# Allegro board AVRUSB5.brd
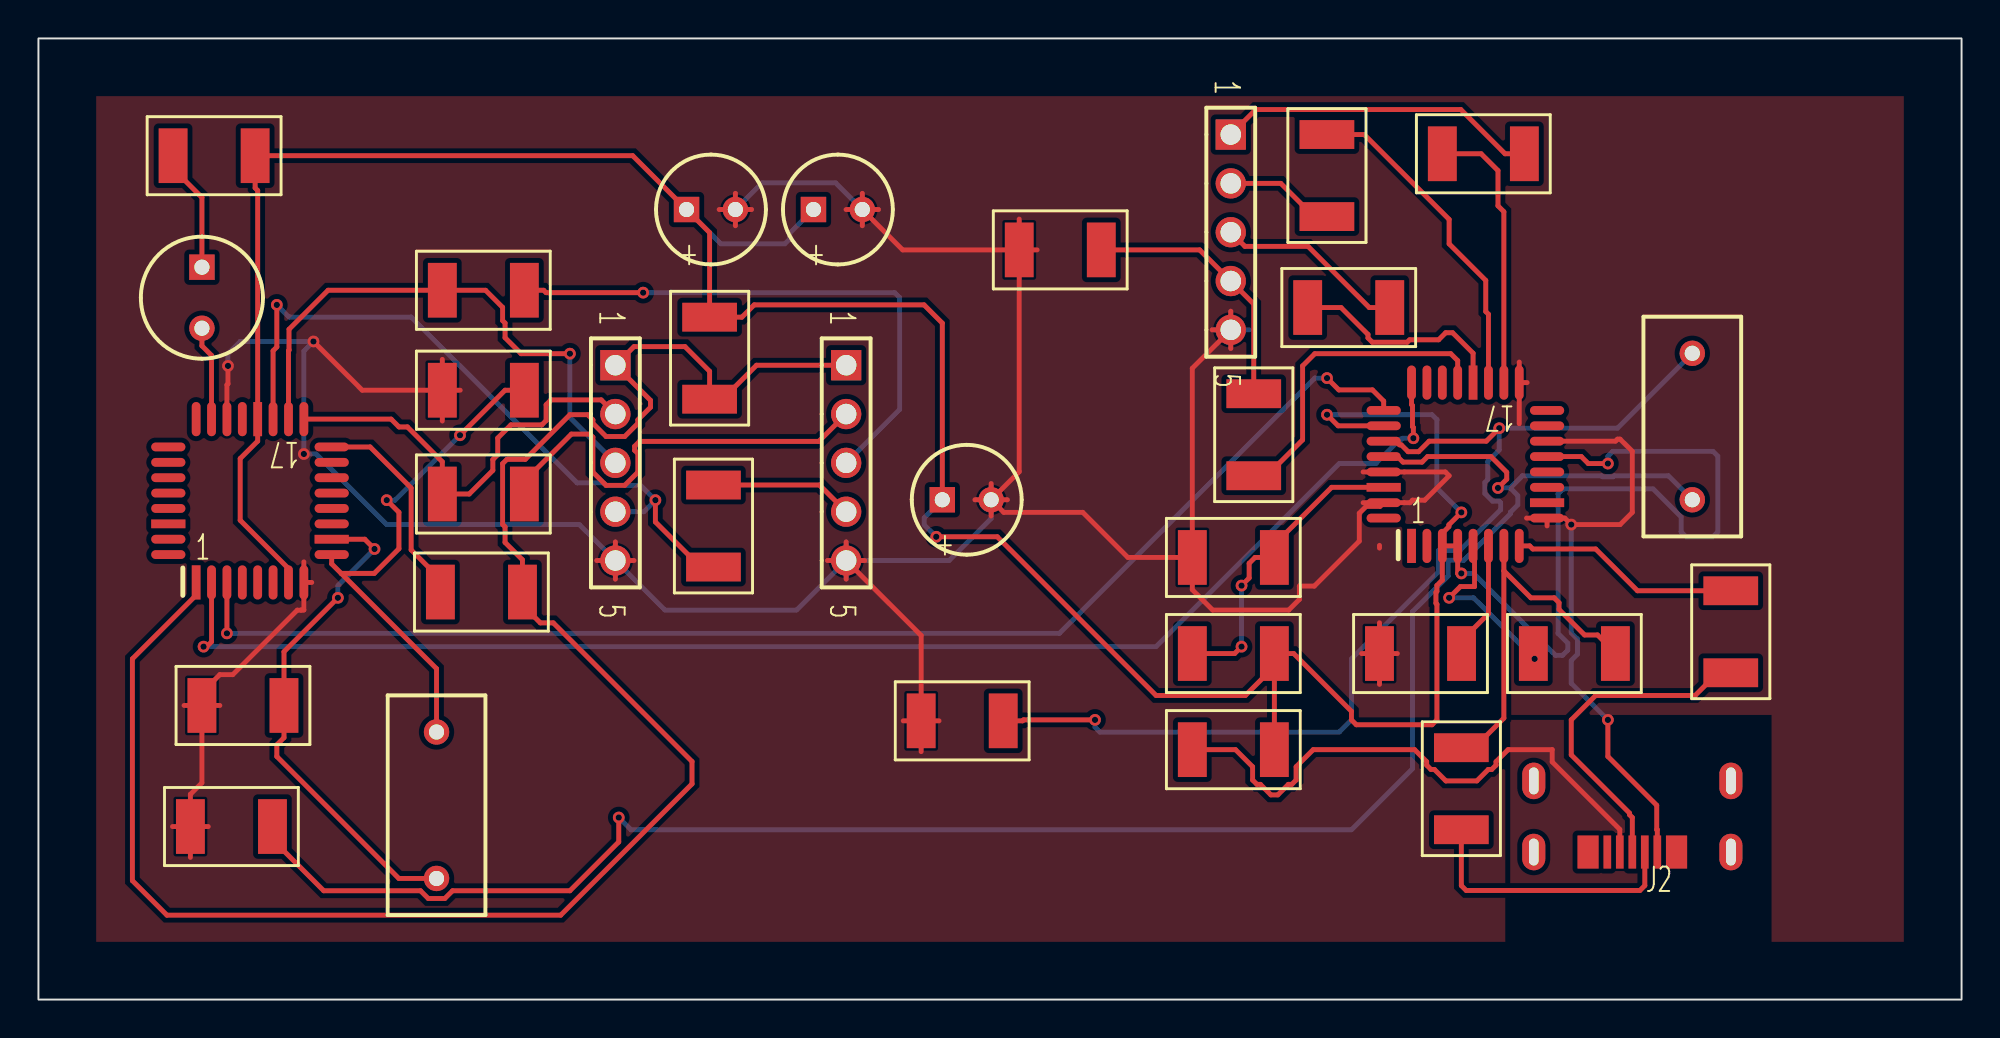
[diagram p0: board, top side]
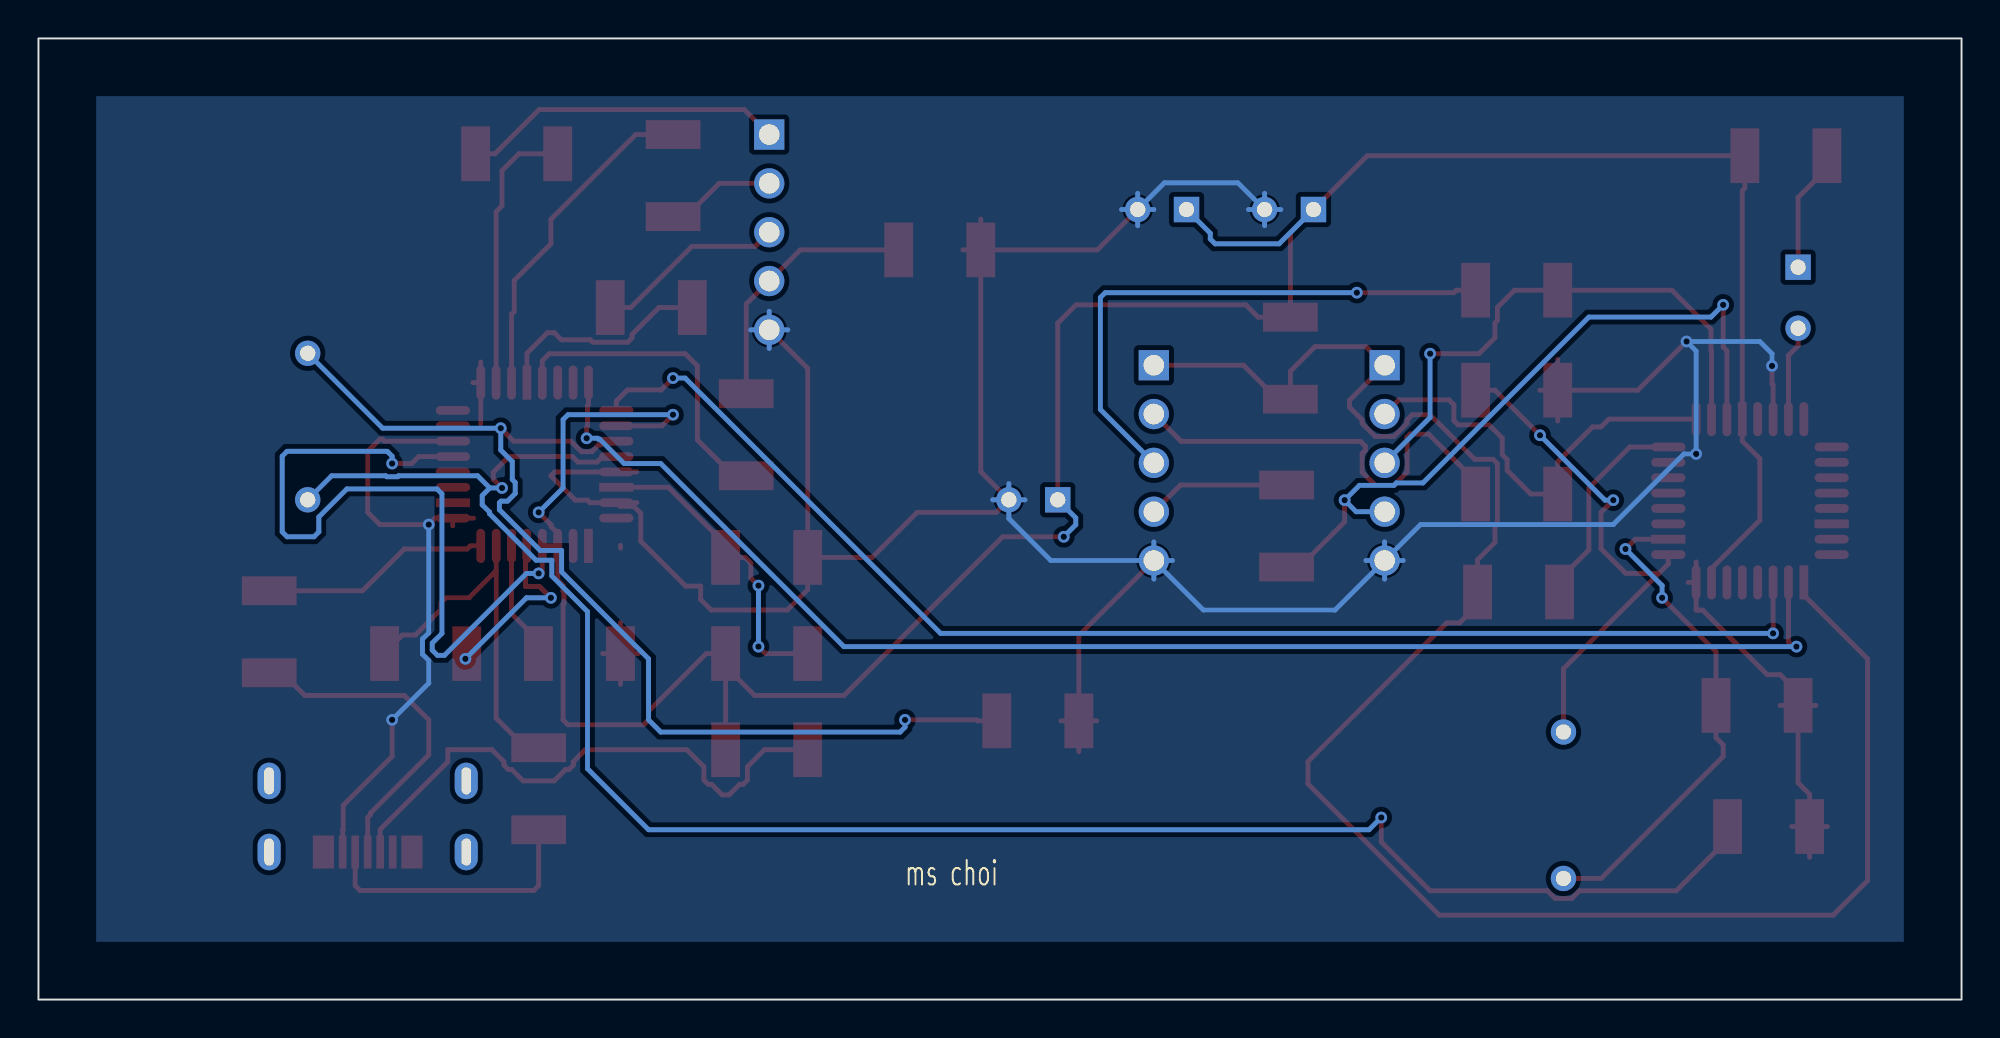
[diagram p1: board, bottom side, seen from below]

Outline 100 x 50 mm; copper layers: TOP, BOTTOM. Coordinates in mm from the lower left corner of the outline.
Outline path: rectangle 0,0 100,50

## Design rules (mm)
constraint set DEFAULT: min track width 0.254

## Placement (name value [footprint] x y rotation side)
C1  47nF  [CPCYL1D225LS100031]  60 23 0 top
C2  27pF  [CPCYL1D225LS100031]  7.9 9 0 top
C3  27pF  [CPCYL1D225LS100031]  45.9 14.5 0 top
C4  47nF  [CPCYL1D225LS100031]  74 18 180 top
C5  100nF  [CPCYL1D225LS100031#2]  33.7 41.1 0 top
C6  1uF  [CPCYL1D225LS100031#2]  47 26 0 top
C7  100nF  [CPCYL1D225LS100031]  21 31.7 0 top
C8  100nF  [CPCYL1D225LS100031]  8.5 15.3 0 top
C9  100nF  [CPCYL1D225LS100031#2]  40.3 41.1 0 top
C10  22nF  [CPCYL1D225LS100031]  51 39 0 top
D1  LED  [CYLD250LS125031]  8.5 38.1 270 top
IC1  ATmega8  [QUAD80M32WG900]  8.2 21.7 0 top
J1  bbpg_Bitbang  [BLKCON100VHTM1SQSW1005]  62 45 270 top
J2  USBA  [USB_MICRO]  82.88 11.38 180 top
J3  avrusb500_out  [BLKCON100VHTM1SQSW1005]  42 33 270 top
J4  firmware_in  [BLKCON100VHTM1SQSW1005]  30 33 270 top
NOREF  -  []  100 0 90 top
NOREF#2  -  []  0 50 0 top
R1  470  [AX400X100031]  60 18 0 top
R2  220  [AX400X100031]  63.19 27.25 90 top
R3  220  [AX400X100031]  66 36 0 top
R4  220  [AX400X100031]  67 45 270 top
R5  27  [AX400X100031]  88 17 90 top
R6  27  [AX400X100031]  73.99 8.84 90 top
R7  1.5k  [AX400X100031]  82 18 180 top
R8  2.2  [AX400X100031]  60 13 0 top
R9  10k  [AX400X100031]  34.9 35.5 270 top
R10  470  [AX400X100031]  7 43.9 0 top
R11  1k  [AX400X100031]  35.1 22.5 90 top
R12  220  [AX400X100031]  21 36.9 0 top
R13  1k  [AX400X100031]  21 26.3 0 top
R14  220  [AX400X100031]  73 44 0 top
R15  220  [AX400X100031]  20.9 21.2 0 top
U1  FT232BM  [QUAD80M32WG900]  71.4 23.6 0 top
Y1  3.6864Mhz  [RAD450X200LS300031]  20.7 6.3 90 top
Y2  6Mhz  [RAD450X200LS300031]  86 26 90 top

## Library data of the parts
C1-C5 C7-C10 = CAPACITOR NON-POL: alternate symbols: (SML2015)
C6 = CAPACITOR POL: alternate symbols: (SML2015)
D1 = LED
IC1 = ATmega8-DIL28_1
J1 J3 J4 = CON5
J2 = CON4_7
R1-R15 = R: alternate symbols: (SML2015)
U1 = FT232BM_2: alternate symbols: (JEDECMS026)
Y1 Y2 = ZTA

## Footprints (pads in the part's own frame, mm; a bottom-side part is the same pattern mirrored in y, then rotated)
AX400X100031
  rect 1.499x2.845 smd: 1(0,0) 2(4.267,0)
BLKCON100VHTM1SQSW1005
  rect 1.575x1.575 hole 1.067: 1(0,0)
  round 1.575 hole 1.067: 2(2.54,0) 3(5.08,0) 4(7.62,0) 5(10.16,0)
CPCYL1D225LS100031
  rect 1.499x2.845 smd: 1(0,0) 2(4.267,0)
CPCYL1D225LS100031#2
  rect 1.321x1.321 hole 0.787: 1(0,0)
  round 1.321 hole 0.787: 2(2.54,0)
CYLD250LS125031
  rect 1.321x1.321 hole 0.787: 1(0,0)
  round 1.321 hole 0.787: 2(3.175,0)
QUAD80M32WG900
  rect 0.457x1.778 smd: 1(0,0) 20(3.2,8.496)
  oval 0.457x1.778 smd: 2(0.8,0) 3(1.6,0) 4(2.4,0) 5(3.2,0) 6(4,0) 7(4.801,0) 8(5.601,0) 17(5.601,8.496) 18(4.801,8.496) 19(4,8.496) 21(2.4,8.496) 22(1.6,8.496) 23(0.8,8.496) 24(0,8.496)
  oval 1.778x0.457 smd: 9(7.048,1.448) 11(7.048,3.048) 12(7.048,3.848) 13(7.048,4.648) 14(7.048,5.448) 15(7.048,6.248) 16(7.048,7.048) 25(-1.448,7.048) 26(-1.448,6.248) 27(-1.448,5.448) 28(-1.448,4.648) 29(-1.448,3.848) 31(-1.448,2.248) 32(-1.448,1.448)
  rect 1.778x0.457 smd: 10(7.048,2.248) 30(-1.448,3.048)
RAD450X200LS300031
  round 1.321 hole 0.787: 1(0,0) 2(7.62,0)
USB_MICRO
  oval 1.2x1.9 hole 0.5x1.4: (-5.125,3.7) (-5.125,0) (5.125,3.7) (5.125,0)
  rect 1.1x1.72 smd: (-2.3,3.7) (2.3,3.7)
  rect 0.4x1.72 smd: 1(-1.3,3.7) 2(-0.65,3.7) 3(0,3.7) 4(0.65,3.7) 5(1.3,3.7)

## Nets
+5V: J2.4 R8.1
GND: C1.1 C2.1 C3.1 C4.2 C5.2 C6.2 C7.1 C8.1 C9.2 C10.1 IC1.8 IC1.22 J1.5 J2.1 J3.5 J4.5 U1.9 U1.14 U1.17 U1.29 U1.31
VCC: C5.1 C6.1 C9.1 IC1.7(VCC) IC1.20 R1.2 R8.2 R9.1 R10.2 U1.3 U1.4 U1.13 U1.26
BMISO: J1.3 R3.2
BMOSI: J1.2 R4.2
BRESET: J1.1 R14.2
BSCK: C10.2 J1.4 R2.2
D+: J2.2 R6.1
D-: J2.3 R5.1
F_MISO: IC1.18 J4.3 R12.1
F_MOSI: IC1.17 J4.2 R13.1
F_SCK: IC1.19 J4.4 R11.1
MISO: J3.3 R12.2
MOSI: J3.2 R13.2
RESET: IC1.1 J3.1 J4.1 R9.2 R15.2
RXD: IC1.2 U1.24
SCK: J3.4 R11.2
TXD: IC1.3 U1.25
N02483: R6.2 R7.1 U1.7
N02615: R5.2 U1.8
N03527: C4.1 U1.6
N06839: R2.1 U1.21
N06967: R3.1 U1.20
N07033: R4.1 U1.19
N07247: R14.1 U1.18
N11951: R7.2 U1.5
N15182: C7.2 IC1.9 Y1.2
N15289: C8.2 IC1.10 Y1.1
N19734: D1.2(CATHODE) IC1.23
N20572: D1.1 R10.1
N22544: IC1.16 R15.1
N41098: C3.2 U1.27 Y2.2
N41106: C2.2 U1.28(XTOUT) Y2.1
N49165: C1.2 R1.1 U1.30

Pads without a net: IC1 4 5 6 11 12 13 14 15 21 24 25 26 27 28 29 30 31 32; J2 5; U1 1 2 10 11 12 15 16 22 23 32

## Via types
v1: diameter 0.61, hole 0.33, TOP to BOTTOM, 30 vias

## Routing (per net, layer and track width the routed paths; a pad name or vN(x,y) marks a point on that pad's centre or on a via; arc(x,y) is an arc through that point)
+5V: length 29.8
  TOP w0.254: J2.4 82.23,8.85 78.71,12.36 78.71,13 76.42,13 75.79,12.37 75.79,12.19 75.57,11.97 75.39,11.97 74.8,11.38 73.19,11.38 72.59,11.97 72.41,11.97 72.19,12.19 72.19,12.37 71.56,13 66.29,13 65.4,12.11 65.4,11.42 65.17,11.2 65,11.2 64.45,10.65 64.09,10.65 63.54,11.2 63.36,11.2 63.14,11.42 63.14,12.11 62.25,13 R8.1
GND: length 270.2
  TOP w0.254: v1(9.85,32.97) 9.85,32.03 9.8,31.97 IC1.22 ; C3.1 46.83,14.5 ; C3.1 44.97,14.5 ; C3.1 45.9,18.94 J3.5 ; C3.1 45.9,12.9 ; C9.2 44.94,39 C10.1 ; C9.2 43.68,41.1 ; C9.2 42.84,41.94 ; C9.2 42.84,40.26 ; C9.2 42,41.1 ; C10.1 51,40.6 ; C10.1 51,27.46 C6.2 ; C10.1 51.93,39 ; J1.5 62,35.81 ; J1.5 61.03,34.84 ; J1.5 62,33.87 ; J1.5 60,32.84 C1.1 ; U1.31 69.76,25.66 69.04,25.66 68.68,25.3 68.68,23.85 66.35,21.51 65.57,21.51 65.57,20.82 65.02,20.26 61.06,20.26 60,21.32 C1.1 ; U1.31 71.32,25.85 71.45,25.98 72.08,25.98 73.36,27.25 73.16,27.45 U1.29 68.88,27.45 ; U1.31 68.88,25.85 ; U1.9 79.37,25.05 v1(79.7,24.71) 82.25,24.71 82.88,25.34 82.88,28.52 82.25,29.16 82.11,29.16 82,29.05 U1.14 77.79,29.05 ; U1.9 77.38,25.05 ; U1.9 78.45,24.64 ; J3.5 42,23.81 ; J3.5 42,21.87 ; J3.5 41.03,22.84 ; J3.5 42.97,22.84 ; IC1.8 14.21,21.7 ; IC1.8 13.8,20.26 13.66,20.26 13.66,20.26 13.46,20.26 10.1,16.9 9.43,16.9 8.5,15.97 C8.1 ; IC1.8 13.8,22.77 ; C8.1 8.5,11.28 7.9,10.68 C2.1 ; C8.1 7.57,15.3 ; C8.1 9.43,15.3 ; J4.5 30.97,22.84 ; J4.5 30,23.81 ; J4.5 29.03,22.84 ; J4.5 30,21.87 ; 7.9,7.4 C2.1 ; C2.1 6.97,9 ; C2.1 8.83,9 ; 21,30.1 C7.1 ; C7.1 16.84,31.7 v1(14.3,34.24) ; C7.1 21,33.3 ; C7.1 21.93,31.7 ; C4.2 69.73,19.6 ; C4.2 70.66,18 ; C4.2 69.73,16.4 ; C4.2 68.8,18 ; J2.1 84.18,8.84 84.15,8.84 84.15,10.1 81.61,12.65 v1(81.61,14.55) ; C6.2 50.38,26 ; C6.2 50.19,25.34 54.31,25.34 56.65,23 C1.1 ; C6.2 49.54,25.16 ; C6.2 49.54,26.84 ; C6.2 48.7,26 ; 35.4,41.1 C5.2 ; C5.2 37.08,41.1 ; C5.2 36.24,40.26 ; C5.2 36.24,41.94 ; U1.17 77.41,32.1 ; U1.17 77,33.16 ; U1.17 77,29.95 ; 69.73,23.49 69.73,23.63
  BOTTOM w0.254: J3.5 39.43,20.26 32.57,20.26 J4.5 ; J3.5 42,23.81 ; J3.5 47.36,22.84 49.54,25.02 C6.2 ; J3.5 42,21.87 ; J3.5 41.03,22.84 ; 61.03,34.84 J1.5 ; J1.5 62.97,34.84 ; J1.5 62,35.81 ; J1.5 62,33.87 ; C5.2 36.24,41.94 ; C5.2 36.24,40.26 ; C5.2 37.08,41.1 ; C5.2 35.4,41.1 ; C5.2 37.63,42.49 41.45,42.49 C9.2 ; C6.2 50.38,26 ; C6.2 48.7,26 ; C6.2 49.54,26.84 ; 29.03,22.84 J4.5 ; J4.5 28.13,24.71 18.11,24.71 14.44,28.38 v1(13.8,28.38) 13.8,33.74 v1(14.3,34.24) 10.49,34.24 9.85,33.6 v1(9.85,32.97) ; J4.5 30.97,22.84 ; J4.5 30,21.87 ; J4.5 30,23.81 ; C9.2 43.68,41.1 ; C9.2 42,41.1 ; C9.2 42.84,41.94 ; C9.2 42.84,40.26 ; v1(81.61,14.55) 79.7,16.46 79.7,17.64 80.03,17.97 80.03,18.75 79.7,19.08 v1(79.7,24.71)
VCC: length 190.6
  TOP w0.254: v1(73.99,25.34) 73.34,24.7 73.34,24.6 73,24.26 U1.3 ; v1(81.61,27.88) 80.59,27.88 80.23,28.25 U1.13 ; IC1.7 13,22.42 10.49,24.93 10.49,28.14 11.4,29.05 IC1.20 11.4,42.09 11.27,42.22 R10.2 30.9,43.9 C5.1 34.9,39.9 R9.1 36.58,35.5 37.22,36.14 46.05,36.14 47,35.19 C6.1 ; v1(73.99,22.17) 73.8,22.17 U1.4 U1.3 ; U1.3 73,21.82 72.72,21.54 72.72,21.24 72.67,21.19 72.67,20.62 72.72,20.56 72.72,14.55 72.47,14.3 68.53,14.3 68.27,14.55 68.27,15 65.27,18 R1.2 64.27,17.33 ; v1(46.69,24.07) 49.86,24.07 58.12,15.82 62.76,15.82 64.27,17.33 ; 64.27,17.33 R8.2 ; U1.26 67.58,29.85 v1(67,30.43)
  BOTTOM w0.254: C5.1 35.49,39.31 38.81,39.31 39.06,39.57 39.06,39.87 C9.1 ; v1(81.61,27.88) 81.61,28.27 81.86,28.52 87.07,28.52 87.32,28.27 87.32,24.33 87.07,24.07 85.67,24.07 85.42,24.33 85.42,25.11 83.96,26.56 79.27,26.56 79.02,26.31 79.02,19.05 79.52,18.54 79.52,18.18 79.25,17.91 78.89,17.91 74.62,22.17 v1(73.99,22.17) ; C6.1 46.06,25.06 46.06,24.7 v1(46.69,24.07) ; v1(67,30.43) 72.47,30.43 72.72,30.17 72.72,26.62 v1(73.99,25.34)
BMISO: length 9.9
  TOP w0.254: R3.2 69.2,36 66.02,39.18 62.74,39.18 J1.3
BMOSI: length 5.7
  TOP w0.254: R4.2 66.33,40.73 64.6,42.46 J1.2
BRESET: length 16.8
  TOP w0.254: J1.1 63.3,46.3 73.96,46.3 76.26,44 R14.2
BSCK: length 13.8
  TOP w0.254: R2.2 63.19,36.19 J1.4 60.38,39 C10.2
D+: length 14.4
  TOP w0.254: R6.1 73.99,5.93 74.24,5.68 83.28,5.68 83.53,5.93 J2.2
D-: length 17.5
  TOP w0.254: J2.3 82.88,9.47 82.74,9.61 82.74,9.69 79.7,12.73 79.7,14.55 80.98,15.82 86.15,15.82 87.33,17 R5.1
F_MISO: length 29
  TOP w0.254: v1(27.63,33.6) 25.09,33.6 24.26,34.43 24.26,35.19 24.14,35.32 24.14,36.01 23.25,36.9 R12.1 15.06,36.9 13.03,34.87 13.03,33.78 13,33.75 IC1.18
  BOTTOM w0.254: v1(27.63,33.6) 27.63,30.28 J4.3
F_MOSI: length 22.4
  TOP w0.254: J4.2 29.26,31.2 26.65,31.2 26.4,30.94 26.4,30.12 26.17,29.9 24.57,29.9 23.88,29.21 23.88,28.34 23.63,28.09 23.63,27.53 22.4,26.3 R13.1 21,27.98 19.19,29.79 18.75,29.79 18.34,30.2 IC1.17
F_SCK: length 37.4
  TOP w0.254: v1(12.4,36.14) 12.4,33.95 12.2,33.75 IC1.19 ; v1(32.08,25.98) 32.08,24.85 34.43,22.5 R11.1
  BOTTOM w0.254: J4.4 31.48,25.38 v1(32.08,25.98) 31.31,26.75 29.52,26.75 29.39,26.88 28.01,26.88 19.38,35.5 13.03,35.5 v1(12.4,36.14)
MISO: length 29.4
  TOP w0.254: R12.2 26.27,36.9 26.4,36.78 v1(31.44,36.78)
  BOTTOM w0.254: v1(31.44,36.78) 44.53,36.78 44.78,36.52 44.78,30.7 J3.3
MOSI: length 23.2
  TOP w0.254: J3.2 40.58,29.04 31.25,29.04 31,28.78 31,28.57 31.17,28.4 31.17,27.44 30.48,26.75 29.52,26.75 28.83,27.44 28.83,29.26 28.67,29.42 27.71,29.42 25.27,26.97 R13.2
RESET: length 98.8
  TOP w0.254: J3.1 37.34,33 35.57,31.23 R9.2 34.9,32.69 33.62,33.97 30.97,33.97 J4.1 31.83,31.17 31.83,30.81 31.17,30.16 31.17,29.98 30.48,29.29 29.52,29.29 28.83,29.98 28.83,30.16 28.56,30.43 27.63,30.43 25.31,28.1 24.36,28.1 24.14,27.88 24.14,24.72 24.26,24.59 24.26,23.78 25.17,22.88 R15.2 25.17,20.53 26.1,19.6 26.77,19.6 33.99,12.38 33.99,11.22 27.16,4.39 6.68,4.39 4.88,6.19 4.88,17.72 8.2,21.04 IC1.1
RXD: length 73.9
  TOP w0.254: v1(8.59,18.36) 8.75,18.36 9,18.61 IC1.2 ; v1(71.5,29.2) 71.5,29.76 71.45,29.81 71.45,30.9 71.4,30.95 U1.24
  BOTTOM w0.254: v1(71.5,29.2) 70.94,29.2 70.89,29.16 70.81,29.16 69.55,27.88 67.64,27.88 58.12,18.36 v1(8.59,18.36)
SCK: length 7.5
  TOP w0.254: J3.4 40.61,26.77 R11.2
TXD: length 69.3
  TOP w0.254: IC1.3 v1(9.8,19.05) ; v1(67,32.33) 67.62,31.72 69.37,31.72 69.95,31.13 U1.25
  BOTTOM w0.254: v1(67,32.33) 66.37,32.33 53.09,19.05 v1(9.8,19.05)
N02483: length 20.3
  TOP w0.254: R6.2 74.66,13.1 76.2,14.64 76.2,22.31 ; 82,17.37 R7.1 82,18.04 81.07,18.97 80.4,18.97 79.07,20.29 79.07,20.65 78.82,20.9 77.61,20.9 76.2,22.31 ; 76.2,22.31 U1.7
N02615: length 12
  TOP w0.254: U1.8 77.54,23.6 77.7,23.44 80.98,23.44 83.15,21.27 R5.2
N03527: length 6.2
  TOP w0.254: C4.1 74,18.67 75.4,20.07 U1.6
N06839: length 16.8
  TOP w0.254: U1.21 73.8,33.24 73.44,33.6 66.37,33.6 65.74,32.97 65.74,29.12 63.87,27.25 R2.1
N06967: length 11.6
  TOP w0.254: R3.1 67.74,36 69.14,34.6 69.14,34.42 69.36,34.2 71.17,34.2 71.3,34.32 72.81,34.32 73.18,34.69 73.54,34.69 74.6,33.62 U1.20
N07033: length 17.5
  TOP w0.254: R4.1 68.94,45 73.36,40.59 73.36,39.31 75.26,37.41 75.26,35.79 75.4,35.65 U1.19
N07247: length 14.4
  TOP w0.254: R14.1 75.02,44 75.89,43.12 75.89,41.29 76.2,40.99 U1.18
N11951: length 9.5
  TOP w0.254: v1(73.36,20.9) 73.94,21.48 74.68,21.48 74.68,22.86 74.6,22.86 U1.5
  BOTTOM w0.254: v1(77.8,17.72) 74.62,20.9 v1(73.36,20.9)
N15182: length 27.3
  TOP w0.254: IC1.9 15.25,22.66 15.74,22.17 ; 15.74,22.17 17.46,22.17 18.75,23.46 18.75,25.34 v1(18.11,25.98) ; 15.74,22.17 20.7,17.21 Y1.2 ; C7.2 24.26,31.7 v1(21.92,29.36)
  BOTTOM w0.254: v1(21.92,29.36) 18.54,25.98 v1(18.11,25.98)
N15289: length 26.3
  TOP w0.254: v1(15.57,20.9) 12.77,18.1 C8.2 12.77,13.62 12.4,13.25 12.4,12.65 18.74,6.3 Y1.1 ; IC1.10 16.97,23.95 v1(17.47,23.44)
  BOTTOM w0.254: v1(15.57,20.9) 15.57,21.53 v1(17.47,23.44)
N19734: length 4.9
  TOP w0.254: D1.2 8.5,34.01 9,33.51 IC1.23
N20572: length 6.4
  TOP w0.254: R10.1 7,43.23 8.5,41.73 D1.1
N22544: length 11.1
  TOP w0.254: IC1.16 17.25,28.75 19.38,26.62 19.38,23.39 20.9,21.87 R15.1
N41098: length 57.2
  TOP w0.254: v1(75.96,29.72) 75.29,29.05 72.31,29.05 71.77,28.5 71.22,28.5 70.87,28.86 70.78,28.86 70.59,29.05 U1.27 ; C3.2 51.17,14.5 51.22,14.55 v1(54.94,14.55)
  BOTTOM w0.254: Y2.2 82.1,29.72 v1(75.96,29.72) 75.96,28.59 75.36,27.99 75.36,27.05 75.21,26.9 75.21,26.33 75.61,25.93 75.95,25.93 76.03,25.84 76.03,25.48 73.91,23.36 72.8,23.36 72.8,22.25 68.27,17.73 68.27,14.55 67.64,13.91 55.19,13.91 54.94,14.17 v1(54.94,14.55)
N41106: length 101.7
  TOP w0.254: v1(30.18,9.47) 30.18,8.2 27.63,5.66 21.53,5.66 21.13,5.26 20.27,5.26 19.87,5.66 14.83,5.66 12.17,8.33 C2.2 ; U1.28 70.67,28.25 70.95,27.96 71.95,27.96 72.23,28.25 75.53,28.25 76.35,27.43 76.35,27.07 v1(75.89,26.62)
  BOTTOM w0.254: v1(75.89,26.62) 76.53,26.62 ; 76.53,26.62 76.93,26.22 76.93,25.74 76.54,25.35 76.54,25.27 74.12,22.86 73.3,22.86 73.3,22.04 71.45,20.18 71.45,12.01 68.27,8.84 30.81,8.84 v1(30.18,9.47) ; 76.53,26.62 77.17,27.25 81.27,27.25 81.32,27.2 81.89,27.2 81.95,27.25 84.75,27.25 Y2.1
N49165: length 16.2
  TOP w0.254: U1.30 67.24,26.65 64.27,23.67 C1.2 63.26,23 62.96,22.69 62.96,21.93 v1(62.56,21.53) ; v1(62.56,18.36) 62.2,18 R1.1
  BOTTOM w0.254: v1(62.56,18.36) v1(62.56,21.53)

## Copper pours and planes (outline as drawn; the poured copper is in the pictures)
+5V on TOP: 76.53,3 76.53,14.55 89.87,14.55 89.87,3 ; 2 cut-outs
GND on TOP: 3,3 3,47 97,47 97,3 ; 17 cut-outs
GND on BOTTOM: 3,3 3,47 97,47 97,3 ; 4 cut-outs

## Text on the board
Ref Des/Silkscreen Bottom: ms choi
DIMENSION: FIGURE | FINISHED_SIZE | 0.33 | 0.787 | 1.067 | 1.4x0.5 | DRILL CHART: TOP to BOTTOM | ALL UNITS ARE IN MILLIMETERS | ROTATION | - | 90.000 | PLATED | QTY | 30 | 12 | 15 | 4
